# EAGLE board SMD_Switch_v01 (EAGLE 6.5.0)
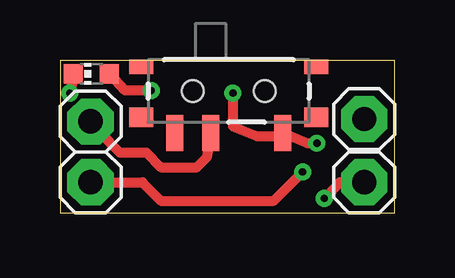
[diagram p0: board, top side]
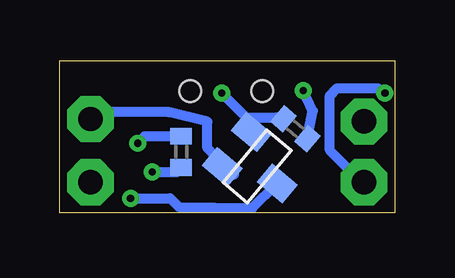
[diagram p1: board, bottom side, seen from below]

Size 13.94 x 6.34 mm. Coordinates in mm from the lower left corner, seen from the top.
Outline: 0,0 13.94,0 13.94,6.34 0,6.34 0,0
Copper layers (1*16): Top 0.035mm / dielectric 1.5mm / Bottom 0.035mm
Design rules "default *": minimum track width 10mil, minimum drill 24mil, track to track 8mil, track to pad 8mil, pad to pad 8mil, via to via 8mil, smd to smd 8mil, copper to edge 40mil, drill to drill 8mil, minimum pad ring 10mil, minimum via ring 8mil, stop-mask expansion 4mil, vias tented up to drill 0.3mm, thermal gap 10mil

## Footprints (pad centres in the part's own frame; a part is rotated, then mirrored left to right if it is on the bottom)
1X01 = drill 1.016 pad 1.93 octagon: 1 0,0
CHIP-LED0603 = smd 0.8 x 0.8: A 0,-0.75; C 0,0.75
SOT23 = smd 1 x 1.4: 1 -0.95,-1.1; 2 0.95,-1.1; 3 0,1.1
R0402 = smd 0.7 x 0.9: 1 -0.65,0; 2 0.65,0
SWITCH-SPST-SMD-A = smd 0.7 x 1.5: 1 -2.25,-1.75; 2 -0.75,-1.75; 3 2.25,-1.75 | smd 1 x 0.6: GND1 -3.65,1; GND3 3.65,1 | smd 1 x 0.8: GND2 -3.65,-1.1; GND4 3.65,-1.1 | hole 0.9: -1.5,0; 1.5,0

## Placement (x,y rotation side)
JP1  [1X01]  12.67,3.91 0 top
JP2  [1X01]  12.67,1.27 0 top
JP3  [1X01]  1.27,3.81 0 top
JP4  [1X01]  1.27,1.27 0 top
LED1  [CHIP-LED0603]  1.3,5.8 90 top
Q1  MOSFET-NCHANNELBSS123LT1G  [SOT23]  5.73,1.93 230 bottom
R1  330  [R0402]  4.13,3.51 140 bottom
R2  1k  [R0402]  8.89,2.54 270 bottom
S1  [SWITCH-SPST-SMD-A]  7.02,5.08 0 top

## Library data of the parts
JP1-JP4 LED1 = adafruit
Q1 = SparkFun-DiscreteSemi; PROD_ID: TRANS-08345
R1 R2 = resistor
S1 = SparkFun-Electromechanical

## Nets
C2: JP1.1 Q1.2
C3: JP2.1 Q1.3
GND: JP4.1 LED1.C R2.2
N$1: LED1.A R1.1
N$2: Q1.1 R1.2 R2.1 S1.3
VCC: JP3.1 S1.2

## Tracks (layer width: path | path; a pad name or v marks a point on that pad's centre or on a via)
C2
  Bottom 0.406: Q1.2 6.69,1.59 7.8,2.7 7.8,3.8 9.4,4.2 12.53,4.2 JP1.1
C3  (via drill 0.3)
  Top 0.406: JP2.1 11.67,1.27 v11,0.6
  Bottom 0.406: v11,0.6 9.35,0.6 9,0.25 5.92,0.2 Q1.3
GND  (via drill 0.3, 0.3 pad 0.3)
  Top 0.406: JP4.1 3.43,1.27 4.2,0.5 8.9,0.5 v10.1,1.7 | v0.4,5 0.6,5.75 LED1.C
  Bottom 0.406: v10.1,1.7 9.08,1.7 R2.2 | JP4.1 1.37,1.27 2.7,2.6 2.7,4.9 2.4,5.2 0.7,5.2 v0.4,5
N$1  (via drill 0.3)
  Top 0.406: v3.8,5.1 2.7,5.1 LED1.A
  Bottom 0.406: R1.1 3.4,4.25 v3.8,5.1
N$2  (via drill 0.3)
  Top 0.406: v7.2,5 7.2,3.6 8.2,3.2 9,3.2 S1.3 10.3,2.9 v10.7,2.9
  Bottom 0.406: Q1.1 6.18,3.98 | 6.18,3.98 v7.2,5 | R2.1 10.41,3.19 v10.7,2.9 | 6.18,3.98 4.93,3.98 R1.2
VCC
  Top 0.406: JP3.1 2.2,2.8 2.49,2.51 3.59,2.51 4.2,1.9 5.7,1.9 6.1,2.3 S1.2

## Text on the board
_tsilk: C2 | GND | C3
_bsilk: 330 | VCC | 1K | C2 | GND | C3